# Altium PCB TDA-antenna_rev2.PcbDoc
Units mm, origin at the board's own origin, x right, y up, seen from the top; angles counter-clockwise.
Board outline 14.1 x 38.6 mm, 4 copper layers (Top Layer, Signal Layer 1, Signal Layer 2, Bottom Layer), stack 0.651 mm thick; 24 components, 26 nets, 93 pads, 42 vias.
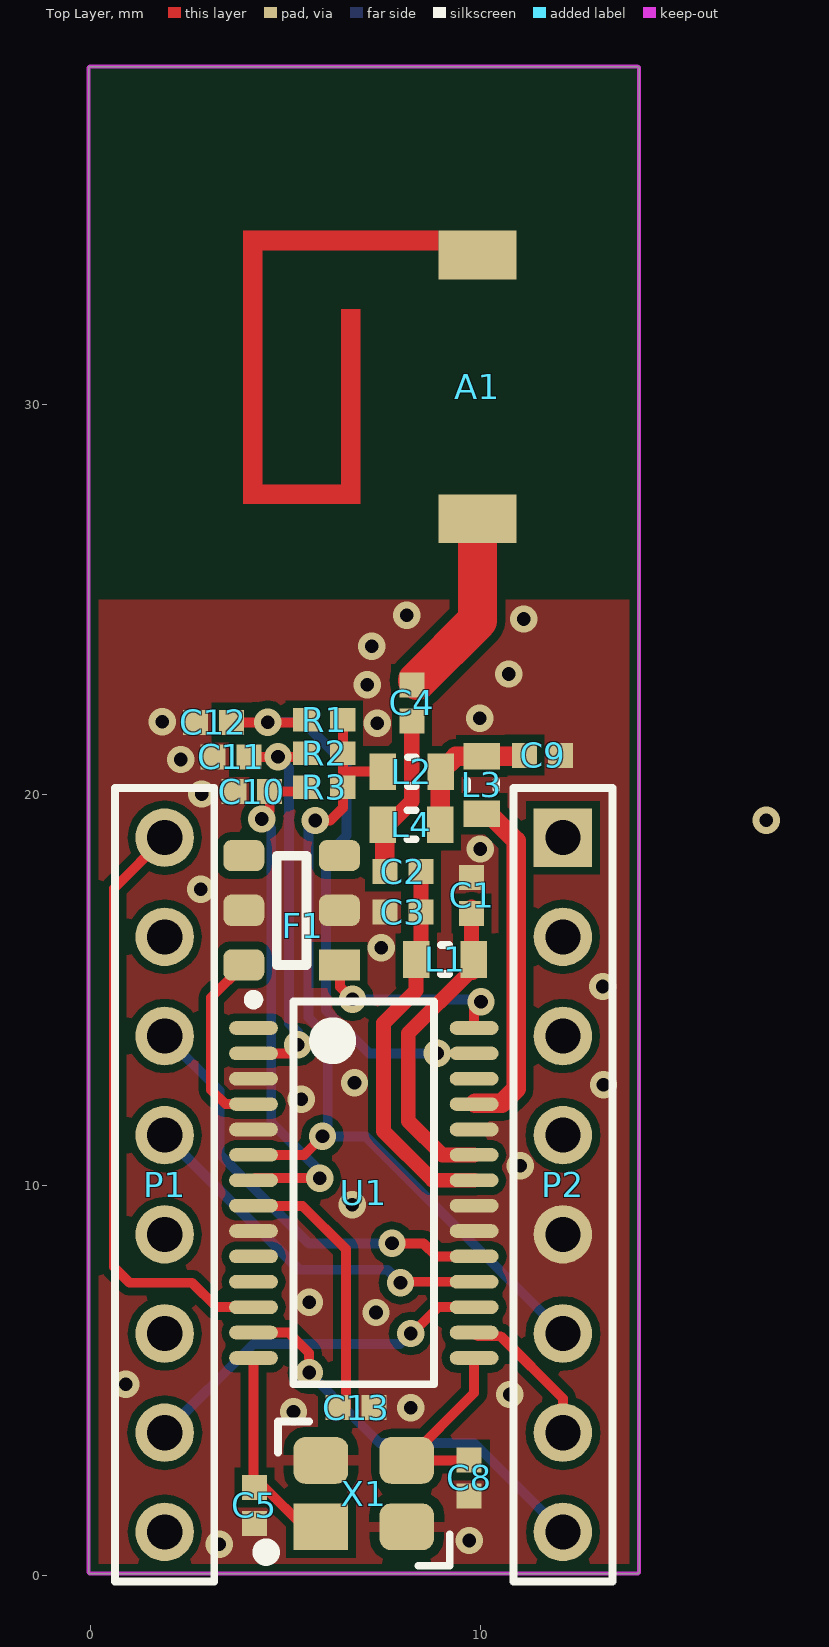
[diagram p0: Top Layer view]
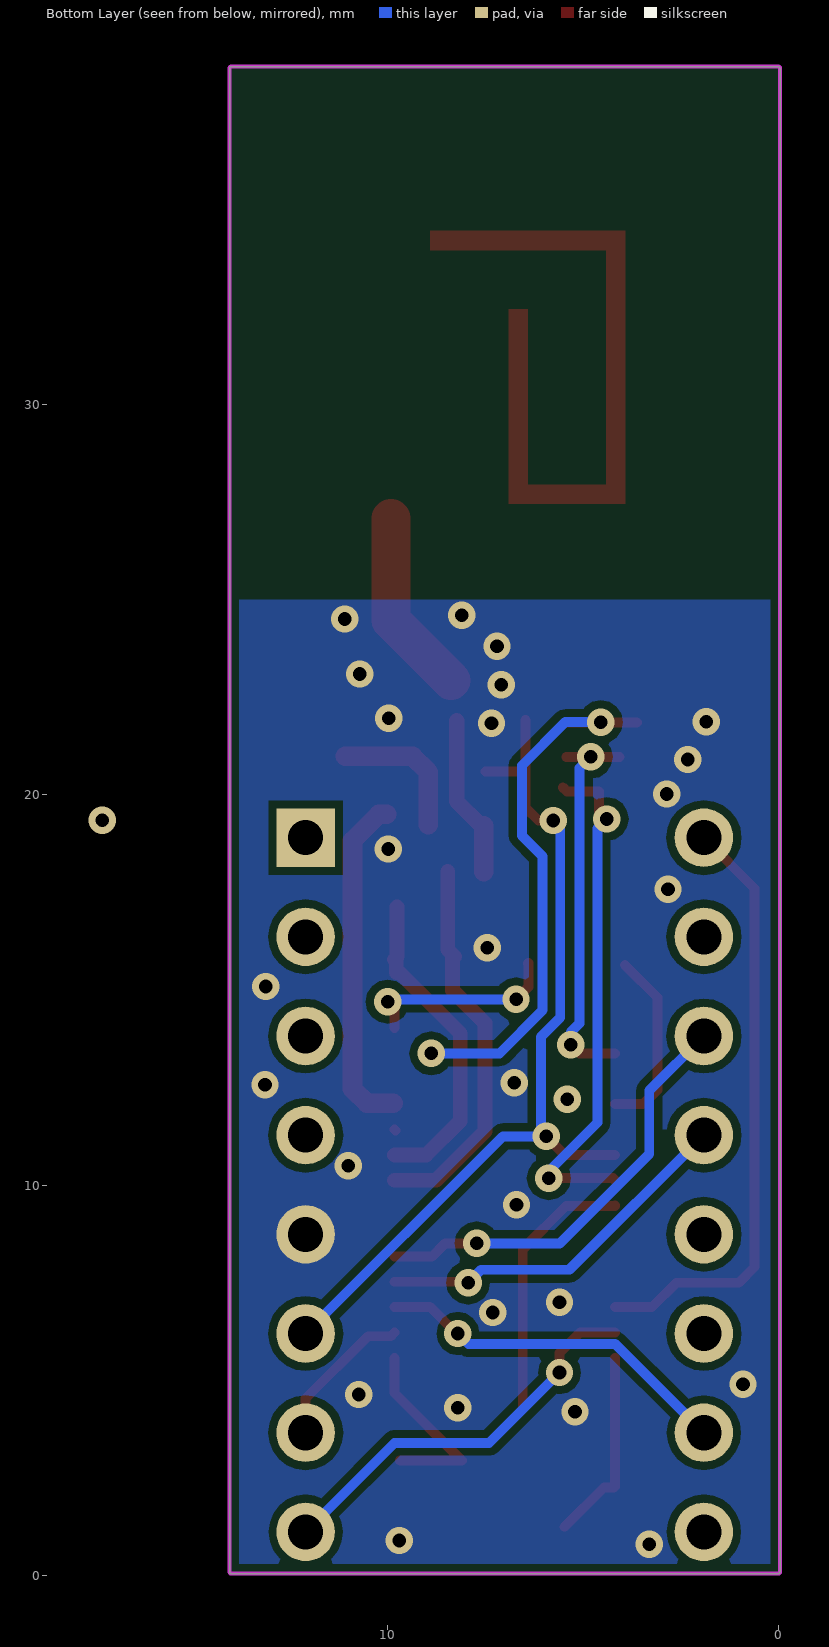
[diagram p1: Bottom Layer view, seen from below]

## Layer stack, top to bottom
Top Solder: solder mask 0.0102, Solder Resist, Dk 3.5
Top Layer: signal copper 0.0356
Dielectric1: prepreg 0.127, FR-4, Dk 4.2
Signal Layer 1: signal copper 0.036
Dielectric 3: core 0.254, FR-4, Dk 4.2
Signal Layer 2: signal copper 0.036
Dielectric 2: prepreg 0.127, FR-4, Dk 4.2
Bottom Layer: signal copper 0.0356
Bottom Solder: solder mask 0.0102, Solder Resist, Dk 3.5

## Board outline
0,0.05 cw(c0,0.1) -0.05,0.1 -0.05,38.6 cw(c0,38.6) 0,38.65 14,38.65 cw(c14,38.6) 14.05,38.6 14.05,0.1 cw(c14,0.1) 14,0.05

## Design rules (kind name [scope] priority, off if disabled: settings)
Clearance Clearance_RF [InNet('RF')] p1: gap=0.22
Clearance [All] p2: gap=0.2
DiffPairsRouting [All] p1: maxlimit=0.254 minlimit=0.254 mostfreqgap=0.254 toplayer_minwidth=0.381 toplayer_maxwidth=0.381 toplayer_prefwidth=0.381 midlayer1_minwidth=0.381 midlayer1_maxwidth=0.381 midlayer1_prefwidth=0.381 midlayer2_minwidth=0.381 midlayer2_maxwidth=0.381 midlayer2_prefwidth=0.381 bottomlayer_minwidth=0.381 bottomlayer_maxwidth=0.381 bottomlayer_prefwidth=0.381 maxuncoupledlength=12.7
MinimumSolderMaskSliver [All] p1: minsoldermaskwidth=0.1
PlaneConnect [InNet('GND')] p1: planeconnectstyle=Relief reliefexpansion=0.508 reliefentries=4 reliefconductorwidth=0.254 reliefairgap=0.254
PolygonConnect PolygonConnect_1 [InComponent('X1')] p1: connectstyle=Relief reliefconductorwidth=0.254 reliefentries=4 polygonreliefangle="90 Angle" airgapwidth=0.254
PolygonConnect [All] p2: connectstyle=Direct reliefconductorwidth=0.254 reliefentries=4 polygonreliefangle="90 Angle" airgapwidth=0.254
RoutingVias [All] p1: holewidth=0.711 width=1.27 viastyle="Through Hole" minholewidth=0.3 minwidth=0.6 maxholewidth=0.711 maxwidth=1.27
SilkToSolderMaskClearance [IsPad] p1: minsilkscreentomaskgap=0 clearancetoexposedcopper=TRUE
SolderMaskExpansion [All] p1: expansion=0.07
Width Width_RF [InNet('RF')] p1: maxlimit=1.1 minlimit=0.254 preferedwidth=1
Width [All] p2: maxlimit=0.7 minlimit=0.254 preferedwidth=0.254 midlayer1_maxwidth=0.254 midlayer2_maxwidth=0.254 minimp=50.000000 maximp=50.000000 favimp=50.000000
26 further rules are at their usual default settings.

## Classes and differential pairs
differential pair RX: +RX_P -RX_N

## Components (designator, comment, footprint, x,y, rotation, side; value= is the part's Value field where it differs from the comment)
A1 "antenna" "Chip Antenna" 9.91,27.07 r0 top
C1 "0402" C0402_M 9.76,17.42 r90 top
C2 "0402" C0402_M 8,18.03 r0 top
C3 "0402" C0402_M 8,16.99 r0 top
C4 "0402" C0402_M 8.23,22.35 r90 top
C5 "0402" C0402_M 4.2,1.8 r90 top
C8 "0402" C0402_M 9.7,2.5 r270 top
C9 "0402" C0402_M 11.58,21.01 r0 top
C10 "0402" C0402_M 4.13,20.08 r0 top
C11 "0402" C0402_M 3.6,20.97 r0 top
C12 "0402" C0402_M 3.15,21.85 r0 top
C13 "0402" C0402_M 6.8,4.3 r180 top
F1 "SFECF10M7EA00" SOP6 5.15,17.04 r180 top
L1 "0603" L0603_M 9.08,15.78 r180 top
L2 "0603" L0603_M 8.23,20.59 r180 top
L3 "0603" L0603_M 10.02,20.25 r90 top
L4 "0603" L0603_M 8.22,19.23 r180 top
P1 "Header 8" HDR1X8#1 1.9,18.9 r270 top
P2 "Header 8" HDR1X8#2 12.1,18.9 r270 top
R1 "0402" R0402_M 5.99,21.92 r0 top
R2 "0402" R0402_M 5.99,21.06 r0 top
R3 "0402" R0402_M 5.99,20.19 r180 top
U1 "TDA5340" INF-PG-TSSOP-28_L 7,9.8 r0 top
X1 "Quarz" QUARZ 7,2.1 r0 top

## Footprints (in the part's own frame and the unit in brackets; to place one, negate y for a bottom-side part, rotate by r counter-clockwise, add the part's x,y. Pads: shape width x height; smd on the part's side, far side on the other; paste and mask are expansions set on the pad)
C0402_M [mm] "Cap 0402(M1005) Medium Density"
  rect 0.64x0.64 smd: 1(-0.46,0) 2(0.46,0)
  body extent -0.56,-0.3 0.56,0.3, height 0.56
"Chip Antenna" [mm]
  rect 2x1.25 smd: 1(0,0) 2(0,6.75)
  Top Layer region: -1,7.375 -6,7.375 -6,6.875 -1,6.875
  Top Layer region: -5.5,7.375 -6,7.375 -6,0.375 -5.5,0.375
  Top Layer region: -3,0.875 -6,0.875 -6,0.375 -3,0.375
  Top Layer region: -3,5.375 -3.5,5.375 -3.5,0.375 -3,0.375
  body extent -1,0 1,7, height 0.8
HDR1X8#1 [mm] "Connector; Header; 8 Position"
  round 1.5 hole 0.9: 1(0,0) 2(2.54,0) 3(5.08,0) 4(7.62,0) 5(10.16,0) 6(12.7,0) 7(15.24,0) 8(17.78,0)
  silkscreen extent -1.27,-1.27 19.05,1.27
HDR1X8#2 [mm] "Connector; Header; 8 Position"
  rect 1.5x1.5 hole 0.9: 1(0,0)
  round 1.5 hole 0.9: 2(2.54,0) 3(5.08,0) 4(7.62,0) 5(10.16,0) 6(12.7,0) 7(15.24,0) 8(17.78,0)
  silkscreen extent -1.27,-1.27 19.05,1.27
INF-PG-TSSOP-28_L [mm] "SOP, 28-Leads, Body 9.7x4.4 mm, Pitch 0.65 mm, IPC High Density"
  oval 1.25x0.35 smd: 1(-2.825,4.225) 2(-2.825,3.575) 3(-2.825,2.925) 4(-2.825,2.275) 5(-2.825,1.625) 6(-2.825,0.975) 7(-2.825,0.325) 8(-2.825,-0.325) 9(-2.825,-0.975) 10(-2.825,-1.625) 11(-2.825,-2.275) 12(-2.825,-2.925) 13(-2.825,-3.575) 14(-2.825,-4.225) 15(2.825,-4.225) 16(2.825,-3.575) 17(2.825,-2.925) 18(2.825,-2.275) 19(2.825,-1.625) 20(2.825,-0.975) 21(2.825,-0.325) 22(2.825,0.325) 23(2.825,0.975) 24(2.825,1.625) 25(2.825,2.275) 26(2.825,2.925) 27(2.825,3.575) 28(2.825,4.225)
  silkscreen extent -2.95,-4.9 1.8,5.07, body extent -2.25,-4.9 2.25,4.9, height 1.2
L0603_M [mm] "Inductor 0603(M1608) Medium Density"
  rect 0.68x0.94 smd: 1(-0.74,0) 2(0.74,0)
  silkscreen extent -0.1,-0.37 0.1,0.37, body extent -0.85,-0.45 0.85,0.45, height 0.55
QUARZ [mm] "3.2x2.5x0.8mm"
  rect 1.4x1.2 smd: 1(-1.1,-0.85)
  rrect50% 1.4x1.2 smd: 2(1.1,-0.85) 3(1.1,0.85) 4(-1.1,0.85)
  silkscreen extent -2.6,-1.85 2.2,1.85, body extent -1.6,-1.25 1.6,1.25, height 0.8
R0402_M [mm] "Res 0402(M1005) Medium Density"
  rect 0.65x0.6 smd: 1(-0.475,0) 2(0.475,0)
  body extent -0.56,-0.3 0.56,0.3, height 0.35
SOP6 [mm]
  round 0.5 on Top Overlay: 1(-1.8,2.2)
  rect 1.05x0.8 smd: 1(-1.225,1.4)
  rrect50% 1.05x0.8 smd: 2(-1.225,0) 3(-1.225,-1.4) 4(1.225,-1.4) 5(1.225,0) 6(1.225,1.4)
  silkscreen extent -0.38,-1.4 0.38,1.4, body extent -1.55,-1.73 1.55,1.73, height 1.4

## Part data
C1 C2 C3 C4 C5 C8 C9 C10 C11 C12 C13: library part Cap0402, "Capacitor"
L1 L2 L3 L4: library part Ind0603, "Inductor"
P1 P2: "Header, 8-Pin"
R1 R2 R3: library part Res0402, "Resistor"
U1: library part CMP-1173-00001-1, "High Sensitivity Multi-Channel Transceiver, -40 to 110 degC, PG-TSSOP-28, Green"

## Via types
v1: diameter 0.7, hole 0.35, Top Layer to Bottom Layer, tented both sides, 40 vias
v2: diameter 0.7/0.7/0.7/0.7 (per signal layer), hole 0.35, Top Layer to Bottom Layer, tented both sides, 1 vias
v3: diameter 0.7, hole 0.35, Top Layer to Bottom Layer, tented bottom, 1 vias

## Nets (pads, with @x,y where several pads share a name; then routed paths per layer and width w, separated by ;. In a path a pad name is that pad's centre, name@x,y a point inside that pad or via, vN(x,y) a via of type N, cw(c..) or ccw(c..) an arc to the next point about the centre after c; other vN are vias at no path point)
+3V3: L2.2 P2.6 R1.2 R2.2 R3.1 U1.6 | length 22.7
  Top Layer w0.254: U1.6 5.465,10.775 v1(5.94,11.25) ; v1(5.76,19.34) 6.14,19.34 6.465,19.665 R3.1 R2.2 R1.2 ; 6.485,20.59 L2.2
  Bottom Layer w0.254: v1(5.76,19.34) 5.579,19.159 5.579,14.292 6.077,13.794 6.077,11.387 v1(5.94,11.25) 7.05,11.25 P2.6
GND: C1.2 C3.1 C5.1 C8.2 C9.2 C10.1 C11.1 C12.1 C13.1 F1.2 F1.5 P2.5 U1.3 U1.5 U1.9 U1.20 U1.21 U1.24 X1.2 X1.4 | length 0
  Top Layer w0.254: U1.24@9.8,11.4 U1.24
  other v1: 3.3,0.8 9.7,0.9 5.2,4.2 8.2,4.3 10.74,4.64 0.9,4.9 7.31,6.74 5.6,7 6.7,9.5 11.01,10.5 5.4,12.2 13.14,12.57 13.12,15.09 7.45,16.08 2.82,17.58 17.31,19.35 2.85,20.02 2.31,20.9 7.34,21.83 1.84,21.87 9.97,21.96 7.09,22.82 10.71,23.09 7.2,23.8 11.1,24.5 8.1,24.6
  other v2: 9.98,18.61
  other v3: 6.76,12.62
MISO/P0.15: P1.3 U1.19 | length 11.2
  Top Layer w0.254: v1(7.72,8.51) 8.524,8.51 8.859,8.175 U1.19
  Bottom Layer w0.254: P1.3 3.3,12.42 3.3,10.8 5.6,8.5 5.61,8.51 v1(7.72,8.51)
MOSI/P0.14: P1.4 U1.18 | length 9.5
  Top Layer w0.254: v1(7.939,7.5) 7.964,7.525 U1.18
  Bottom Layer w0.254: P1.4 5.347,7.833 7.606,7.833 v1(7.939,7.5)
NetC2_1: C2.1 C4.1 L4.2 | length 4.1
  Top Layer w0.4: L4.2@7.63,19.23 8.23,19.83 C4.1
  Top Layer w0.5: C2.1 L4.2@7.54,19.21
NetC5_2: C5.2 U1.14 X1.1 | length 5
  Top Layer w0.254: U1.14 4.175,2.285 C5.2 4.459,2.26 X1.1@5.469,1.25
NetC8_1: C8.1 U1.15 X1.3 | length 4.9
  Top Layer w0.254: C8.1@9.69,2.95 X1.3 9.825,4.675 U1.15
NetC9_1: C9.1 L2.1 L3.2 L4.1 | length 3.6
  Top Layer w0.254: L2.1@8.96,20.58 L2.1
  Top Layer w0.5: L4.1 L2.1@8.96,20.58 ; L2.1 9.36,20.98 10.02,20.98 C9.1@11.09,20.98
NetC10_2: C10.2 R3.2 U1.7 | length 13.3
  Top Layer w0.254: U1.7 4.23,10.18 v1(5.87,10.18) ; v1(4.39,19.38) 4.59,19.58 C10.2 5.405,20.08 R3.2
  Bottom Layer w0.254: v1(4.39,19.38) 4.629,19.141 4.629,11.604 5.87,10.363 v1(5.87,10.18)
NetC11_2: C11.2 R2.1 U1.2 | length 10.2
  Top Layer w0.254: C11.2 v1(4.8,20.97) R2.1@5.425,20.97 ; U1.2 5.085,13.375 v1(5.31,13.6)
  Bottom Layer w0.254: v1(4.8,20.97) 5.083,20.687 5.083,14.145 5.31,13.918 v1(5.31,13.6)
NetC12_2: C12.2 R1.1 U1.27 | length 14.1
  Top Layer w0.254: C12.2 R1.1@5.445,21.85
  Bottom Layer w0.254: v1(4.54,21.86) 5.45,21.86 6.56,20.75 6.56,18.95 6.033,18.423 6.033,14.48 7.138,13.375 v1(8.88,13.375)
NetC13_2: C13.2 U1.8 | length 6.9
  Top Layer w0.254: U1.8 4.181,9.469 5.431,9.469 6.54,8.36 C13.2@6.54,4.3
NetF1_1: F1.1@6.375,15.64 U1.28 | length 5.1
  Top Layer w0.254: F1.1@6.41,15.675 6.39,15.695 6.39,15.08 v1(6.71,14.76) ; U1.28 9.825,14.525 v1(10,14.7)
  Bottom Layer w0.254: v1(6.71,14.76) v1@9.94,14.76
NetF1_6: F1.6 U1.4 | length 4.8
  Top Layer w0.254: F1.6 3.09,14.805 3.09,12.44 3.455,12.075 U1.4
NetL3_1: L3.1 U1.25 | length 8.7
  Top Layer w0.5: U1.25@9.85,12.1 10.534,12.1 10.9,12.466 10.9,18.821 10.221,19.5 L3.1@10.02,19.5
NetP2_7: P2.7 U1.16 | length 3.9
  Top Layer w0.254: U1.16 9.919,6.131 10.505,6.131 12.1,4.536 P2.7
NetP2_8: P2.8 U1.13 | length 10.3
  Top Layer w0.254: U1.13 5.075,6.225 5.6,5.7 v1(5.6,5.2)
  Bottom Layer w0.254: v1(5.6,5.2) 7.4,3.4 9.82,3.4 P2.8
P0.6: P1.8
P0.8: P1.6
P0.9: P1.5
P2.0: P1.2
PP2/P2.6: P1.1 U1.12 | length 15.5
  Top Layer w0.254: P1.1 0.6,17.6 0.6,7.9 1,7.5 2.6,7.5 3.225,6.875 U1.12
RF: A1.1 C4.2 | length 4.8
  Top Layer w1: C4.2@8.38,22.93 9.91,24.46 A1.1
RX_N: C2.2 C3.2 L1.2 U1.22 | length 9.8
  Top Layer w0.381: L1.2@8.28,15.85 8.46,16.03 C3.2 C2.2 ; L1.2 8.34,14.985 7.504,14.15 7.504,11.382 8.761,10.125 U1.22
RX_P: C1.1 L1.1 U1.23 | length 8.2
  Top Layer w0.381: L1.1@9.76,15.85 C1.1 C1.1@9.76,17.12 ; L1.1 9.78,15.74 9.78,15.44 9.693,15.44 8.139,13.887 8.139,11.645 9.009,10.775 U1.23
SCLK/P0.7: P1.7 U1.17 | length 9.5
  Top Layer w0.254: v1(8.2,6.2) 8.234,6.2 8.909,6.875 U1.17
  Bottom Layer w0.254: P1.7@2.16,3.66 P1.7 4.171,5.931 7.931,5.931 v1(8.2,6.2)
pads on no net: A1.2 F1.1@6.95,14.84 F1.3 F1.4 P2.1 P2.2 P2.3 P2.4 U1.1 U1.10 U1.11 U1.26

## Polygon pours and split planes (outlines as drawn)
GND on Bottom Layer "Top Layer-No Net" (solid, pour order 4): 0,38.5 0,0 14,0 14,38.5
GND on Top Layer "Top Layer-No Net" (solid, pour order 2): 0,38.5 14,38.5 14,0 0,0

## Keep-outs
Keep-Out Layer:
  the board outline again, w0.1

## Other copper
Top Layer:
  pour cut-out: 0,38.65 0,25 14,25 14,38.65
Bottom Layer:
  pour cut-out: 0,38.65 0,25 14,25 14,38.65

## Silkscreen, mask and mechanical layers (free items; w line width, h text height)
Mechanical 1:
  the board outline again, w0.01